# Altium PCB N76E003.PcbDoc
Units mm, origin at the board's own origin, x right, y up, seen from the top; angles counter-clockwise.
Board outline 40 x 45 mm, 4 copper layers (Top Layer, Internal Plane 1, Internal Plane 2, Bottom Layer), stack 0.462 mm thick; 13 components, 22 nets, 79 pads, 0 vias.
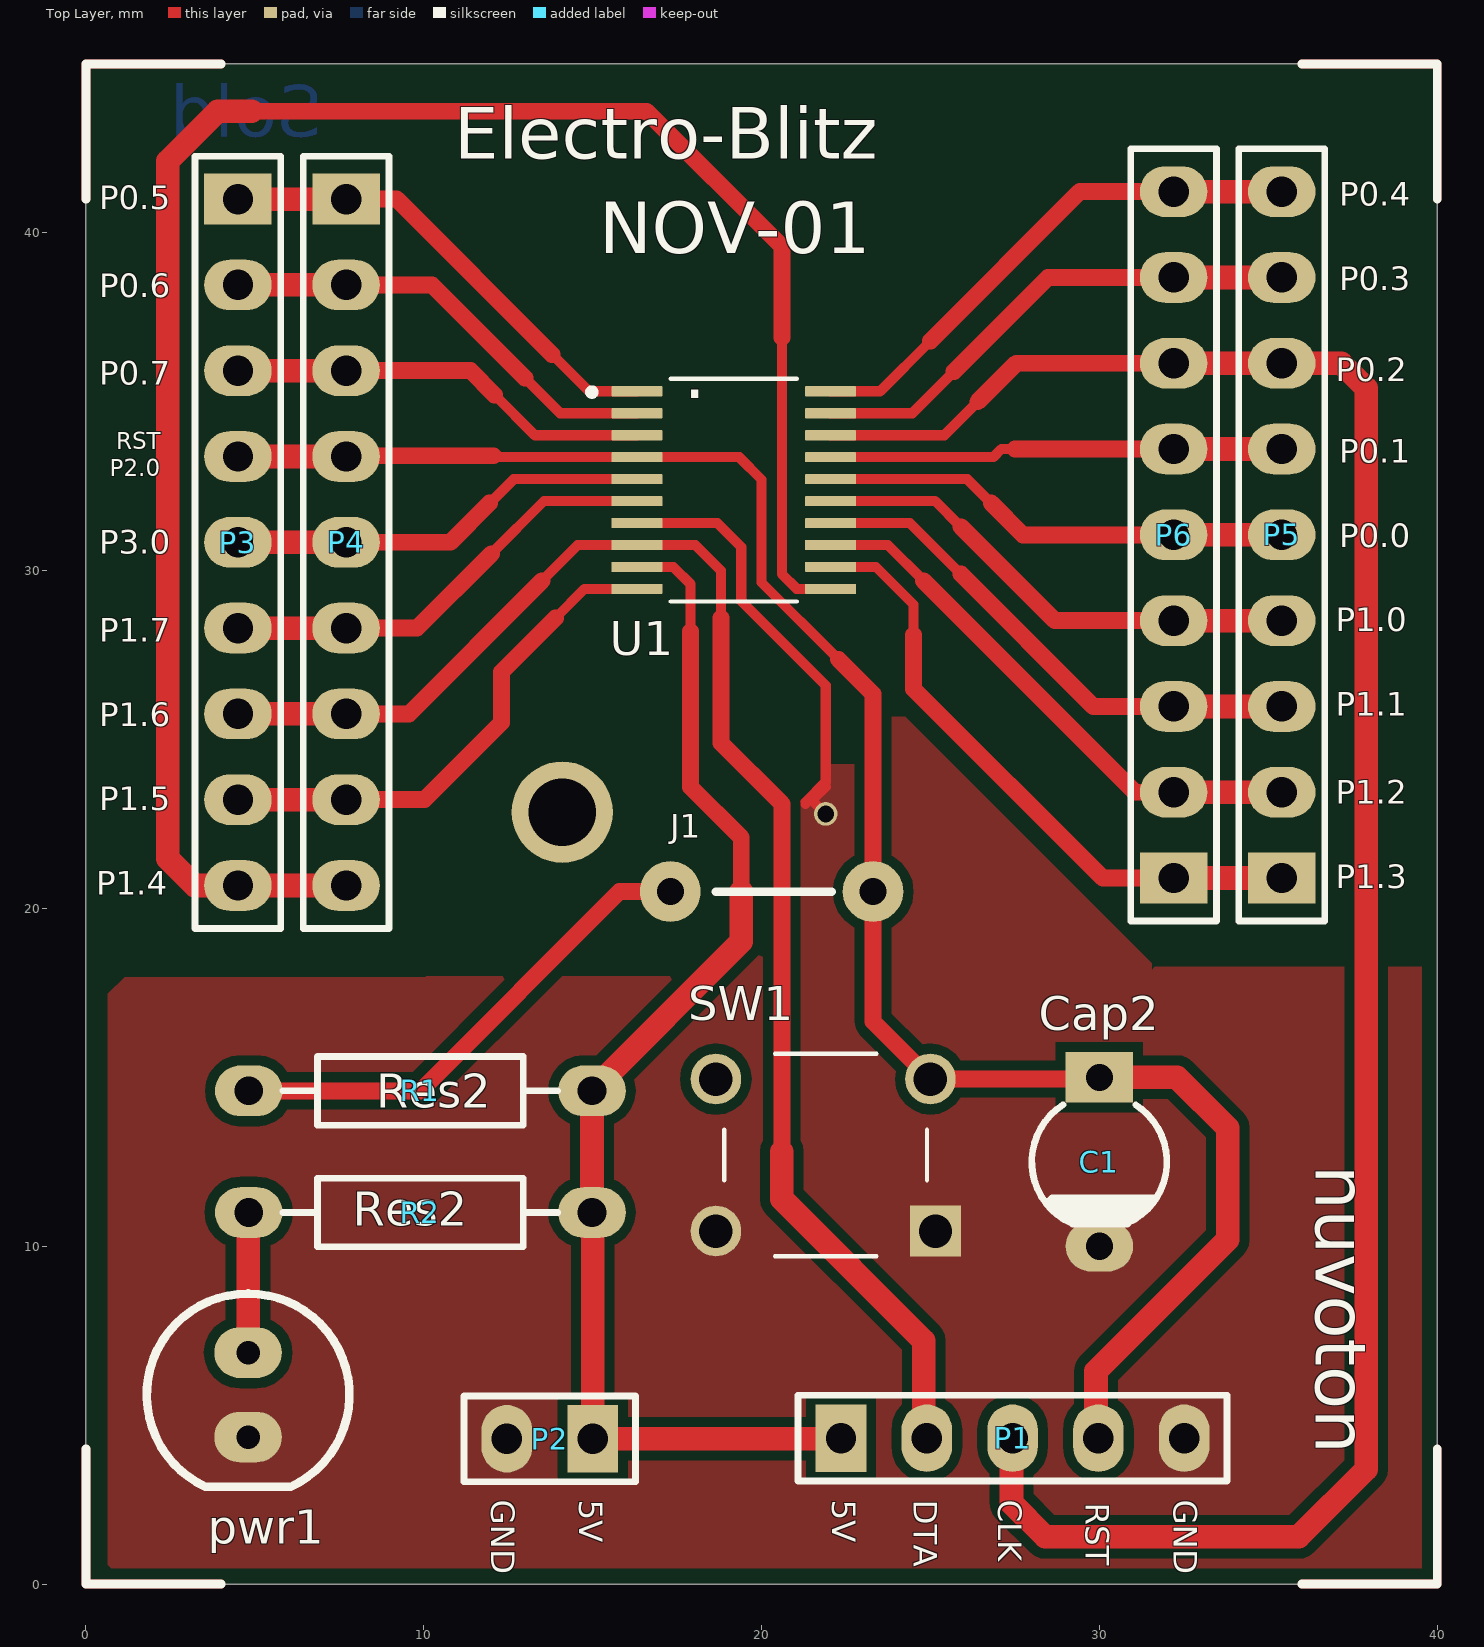
[diagram p0: Top Layer view]
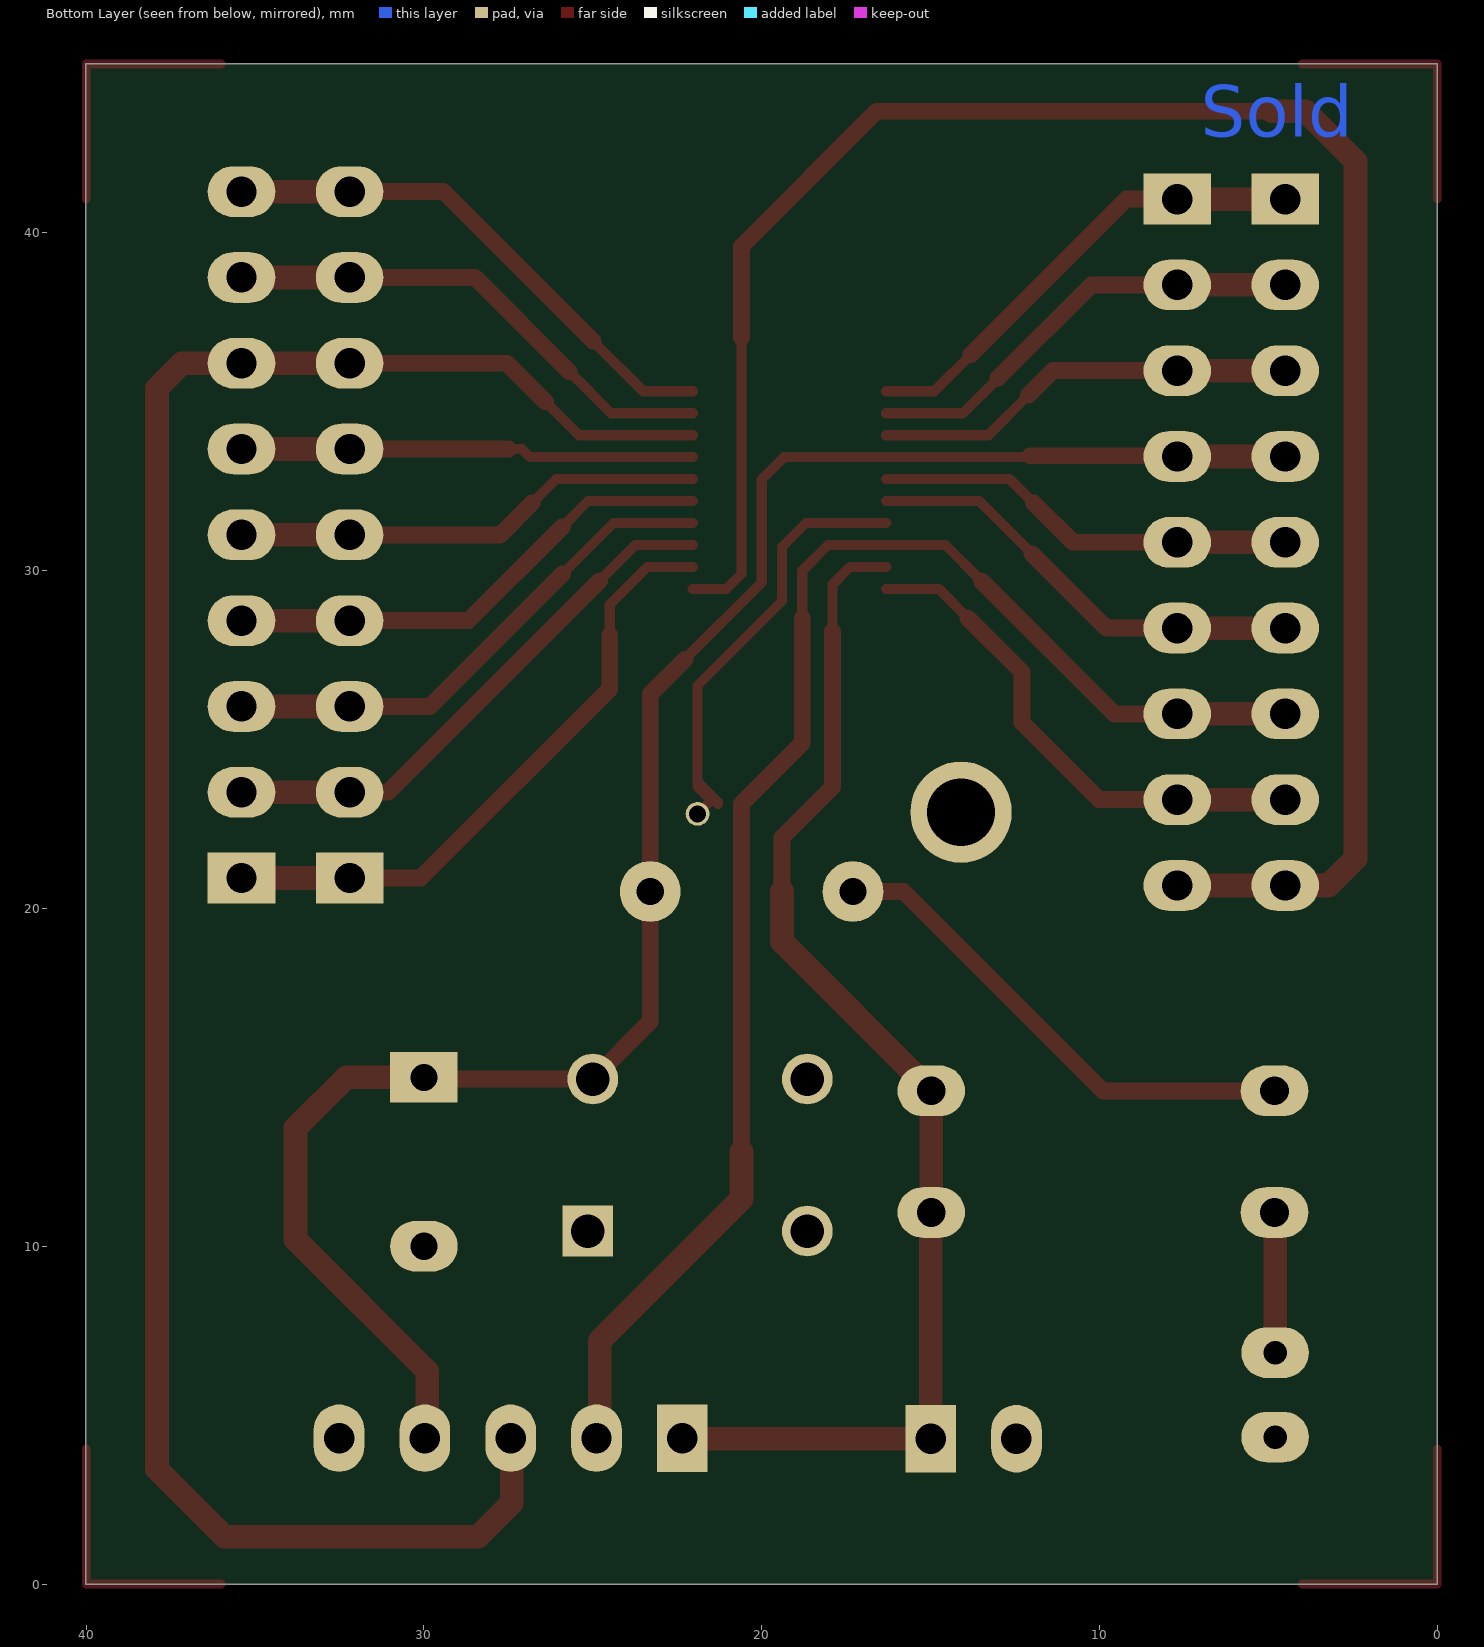
[diagram p1: Bottom Layer view, seen from below]
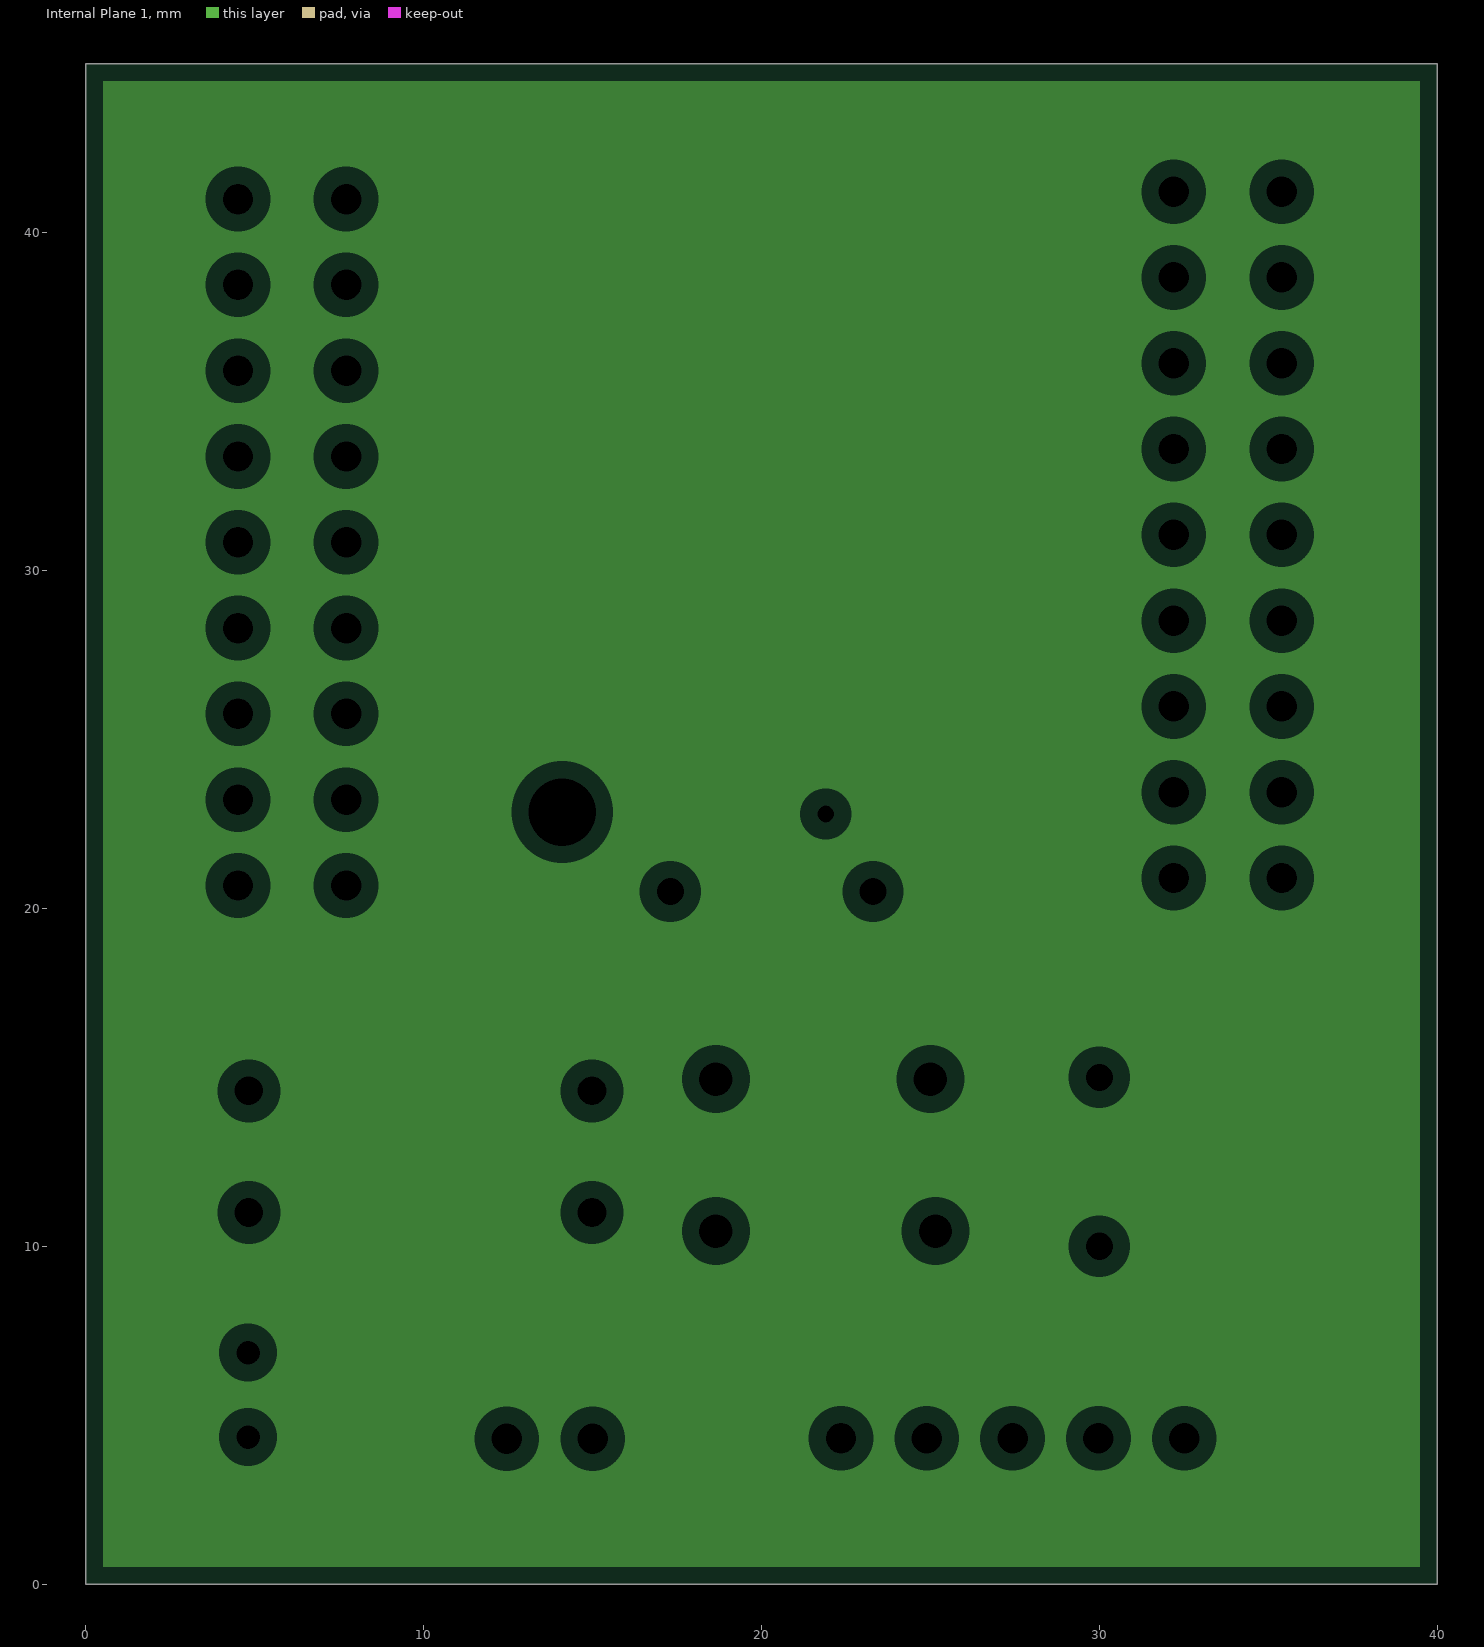
[diagram p2: Internal Plane 1, clearances drawn from the general rule]
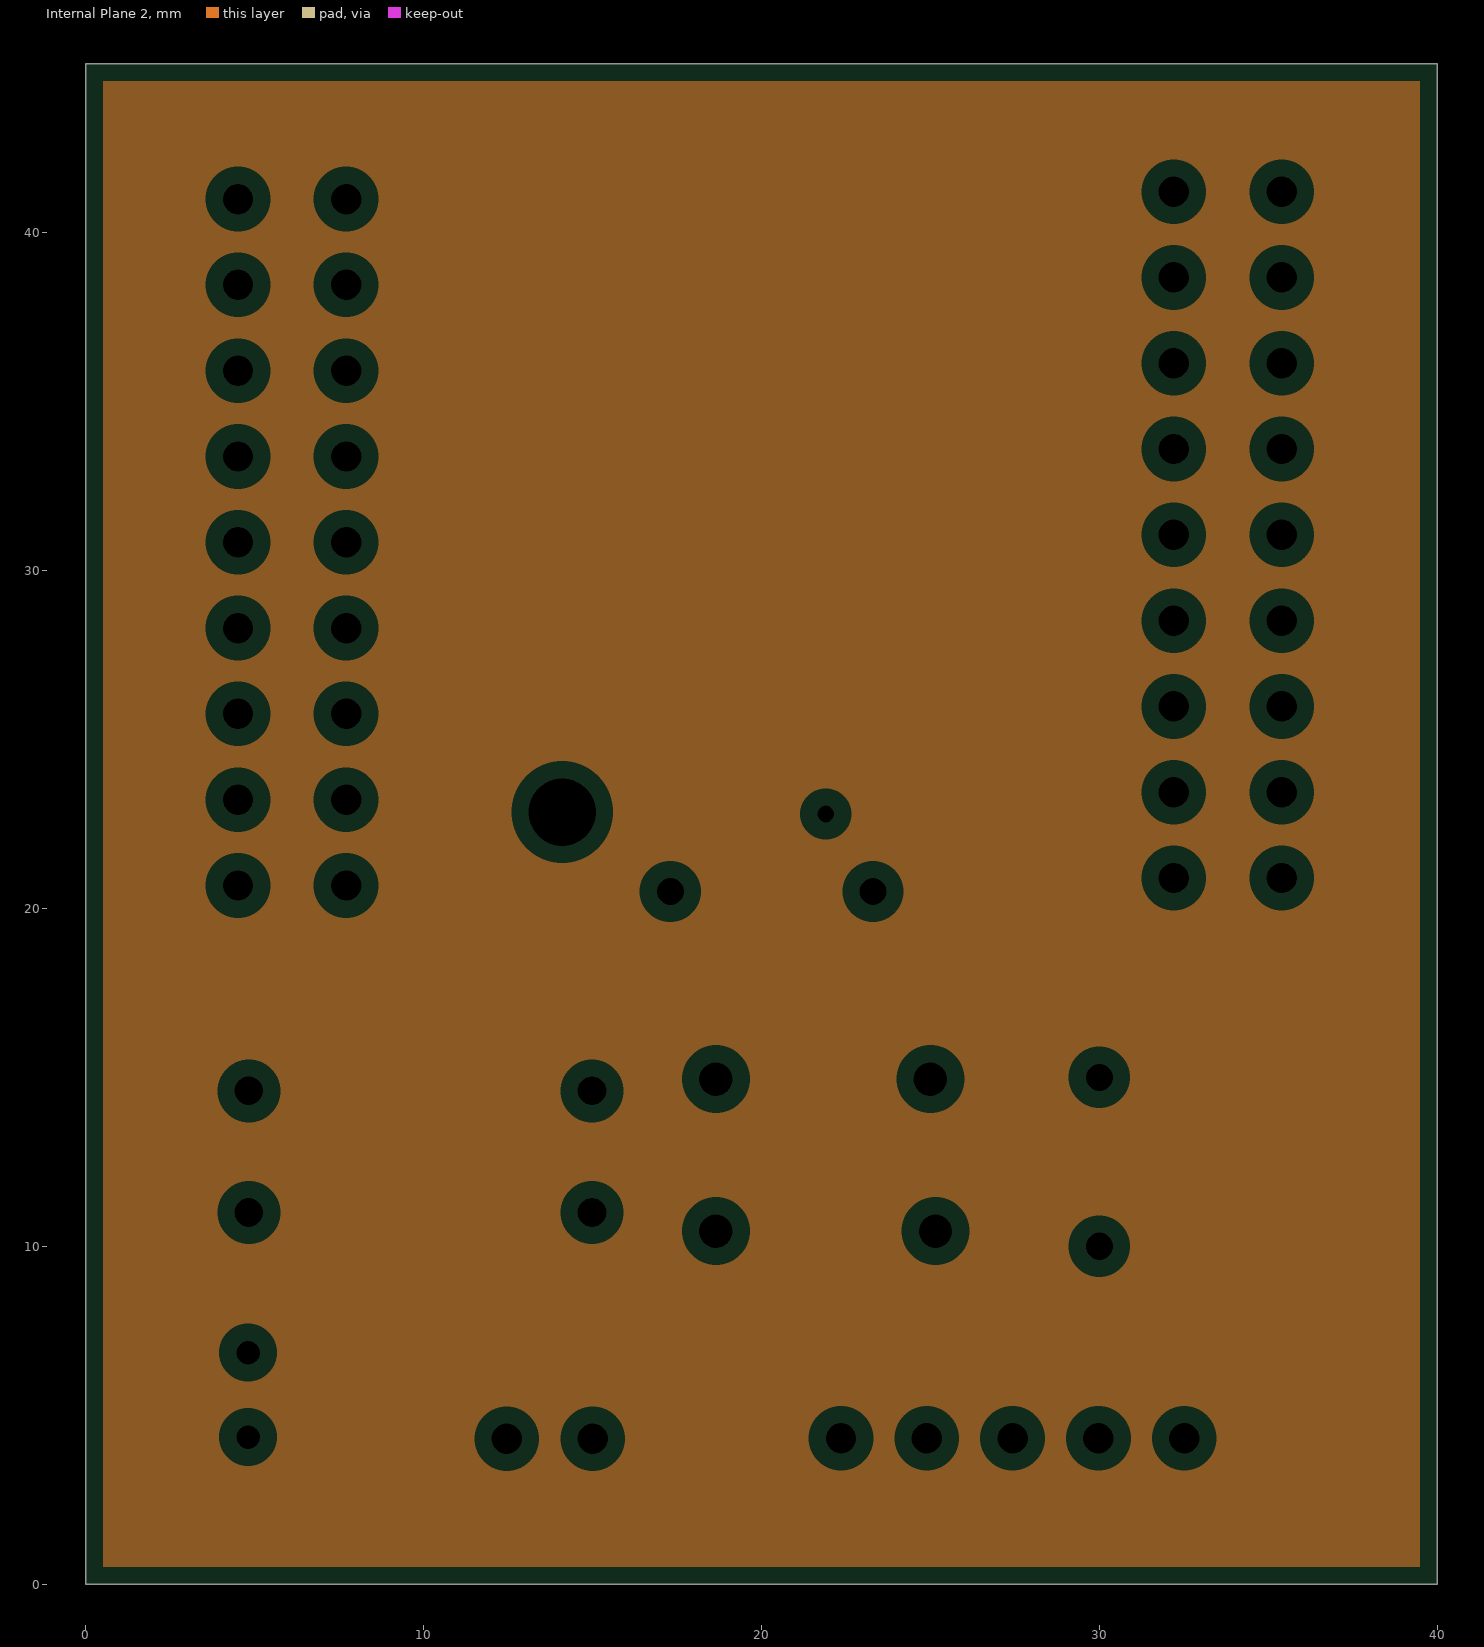
[diagram p3: Internal Plane 2, clearances drawn from the general rule]

## Layer stack, top to bottom
Top Solder: solder mask 0.0102, Solder Resist, Dk 3.5
Top Layer: signal copper 0.0356
Internal Plane 1: plane copper 0.0356
Internal Plane 2: plane copper 0.0356
Dielectric 1: dielectric 0.32, FR-4, Dk 4.8
Bottom Layer: signal copper 0.0356
Bottom Solder: solder mask 0.0102, Solder Resist, Dk 3.5

## Board outline
0,0 0,45 40.005,45 40.005,0

## Design rules (kind name [scope] priority, off if disabled: settings)
Clearance [All] p1: gap=0.3 ignorepadtopadclearanceinfootprint=FALSE
PlaneClearance [All] p1: clearance=0.508
PlaneConnect [All] p1: planeconnectstyle=Relief reliefexpansion=0.508 reliefentries=4 reliefconductorwidth=0.254 reliefairgap=0.254
PolygonConnect [All] p1: connectstyle=Direct reliefconductorwidth=0.254 reliefentries=4 polygonreliefangle="90 Angle" airgapwidth=0.254
RoutingVias [All] p1: holewidth=0.8 width=1.6 viastyle="Through Hole" minholewidth=0.711 minwidth=1.27 maxholewidth=0.711 maxwidth=1.27
SolderMaskExpansion [All] p1: expansion=0.102
Width [All] p1: maxlimit=1 minlimit=0.2 preferedwidth=0.7
28 further rules are at their usual default settings.

## Components (designator, comment, footprint, x,y, rotation, side; value= is the part's Value field where it differs from the comment)
C1 "Cap2" CAPR5-4X5 30,12.5 r270 top value=10uF
J1 "er" jumper 20.3,20.5 r180 top (schematic designator J?)
P1 "ICSP" HDR1X5 22.352,4.318 r0 top
P2 "Power" HDR1X2 15,4.3 r180 top
P3 "PIN(1-9)" HDR1X9 4.5,41 r270 top
P4 "Header 9" HDR1X9 7.7,41 r270 top
P5 "PIN(10-18)" HDR1X9 35.4,20.9 r90 top
P6 "Header 9" HDR1X9 32.2,20.9 r90 top
pwr1 "3mm" 3mm 4.8,5.6 r270 top
R1 "Res2" AXIAL-0.4 9.9,14.6 r0 top value=10K
R2 "Res2" AXIAL-0.4 9.9,11 r180 top value=220E
SW1 "3-1825910-1" TE_3-1825910-1 21.9,12.7 r180 top
U1 "N76E003AT20" SOP65P640X120-20N 19.177,32.385 r0 top

## Footprints (in the part's own frame and the unit in brackets; to place one, negate y for a bottom-side part, rotate by r counter-clockwise, add the part's x,y. Pads: shape width x height; smd on the part's side, far side on the other; paste and mask are expansions set on the pad)
3mm [mm]
  oval 1.5x2 hole 0.7: 1(-1.25,0) 2(1.25,0)
  silkscreen extent -3,-3 2.72,3, body extent -1.92,-1.92 1.52,1.92, height 5.39
AXIAL-0.4 [mm] "Axial Device, Thru-Hole; 2 Leads; 0.4 in Pin Spacing"
  oval 2x1.5 hole 0.85: 1(-5.08,0) 2(5.08,0)
  silkscreen extent -4.06,-1.02 4.06,1.02
CAPR5-4X5 [mm] "Capacitor; 2 Leads"
  rect 1.5x2 hole 0.8: 1(-2.5,0)
  oval 1.5x2 hole 0.8: 2(2.5,0)
  silkscreen extent -1.69,-2 1.82,2
HDR1X2 [mm] "Connector; Header; 2 Position"
  rect 1.5x2 hole 0.9: 1(0,0)
  oval 1.5x2 hole 0.9: 2(2.54,0)
  silkscreen extent -1.27,-1.27 3.81,1.27
HDR1X5 [mm] "Connector; Header; 5 Position"
  rect 1.5x2 hole 0.9: 1(0,0)
  oval 1.5x2 hole 0.9: 2(2.54,0) 3(5.08,0) 4(7.62,0) 5(10.16,0)
  silkscreen extent -1.27,-1.27 11.43,1.27
HDR1X9 [mm] "Connector; Header; 9 Position"
  rect 1.5x2 hole 0.9: 1(0,0)
  oval 1.5x2 hole 0.9: 2(2.54,0) 3(5.08,0) 4(7.62,0) 5(10.16,0) 6(12.7,0) 7(15.24,0) 8(17.78,0) 9(20.32,0)
  silkscreen extent -1.27,-1.27 21.59,1.27
jumper [mm]
  round 1.8 hole 0.8: 1(-3,0) 2(3,0)
  silkscreen extent -1.78,0 1.65,0
SOP65P640X120-20N [mm]
  rrect10% 1.5x0.3 smd: 1(-2.865,2.925) 2(-2.865,2.275) 3(-2.865,1.625) 4(-2.865,0.975) 5(-2.865,0.325) 6(-2.865,-0.325) 7(-2.865,-0.975) 8(-2.865,-1.625) 9(-2.865,-2.275) 10(-2.865,-2.925) 11(2.865,-2.925) 12(2.865,-2.275) 13(2.865,-1.625) 14(2.865,-0.975) 15(2.865,-0.325) 16(2.865,0.325) 17(2.865,0.975) 18(2.865,1.625) 19(2.865,2.275) 20(2.865,2.925)
  silkscreen extent -4.3,-3.3 1.87,3.3
TE_3-1825910-1 [mm]
  rect 1.498x1.498 hole 0.99: 1(-3.25,2.25)
  round 1.498 hole 0.99: 2(3.25,2.25) 3(-3.1,-2.25) 4(3.25,-2.25)
  silkscreen extent -3,-3 3,3

## Part data
C1: "Capacitor", PackageReference=CAPR5-4X5, Published=23-Sep-2002, Publisher="Altium Limited"
J1: library part jumper
P1: library part "Header 5", "Header, 5-Pin", LatestRevisionDate=17-Jul-2002, LatestRevisionNote="Re-released for DXP Platform.", Publisher="Altium Limited"
P2: library part "Header 2", "Header, 2-Pin", LatestRevisionDate=17-Jul-2002, LatestRevisionNote="Re-released for DXP Platform.", Publisher="Altium Limited"
P3 P5: library part "Header 9", "Header, 9-Pin", LatestRevisionDate=17-Jul-2002, LatestRevisionNote="Re-released for DXP Platform.", Publisher="Altium Limited"
P4 P6: "Header, 9-Pin", LatestRevisionDate=17-Jul-2002, LatestRevisionNote="Re-released for DXP Platform.", Publisher="Altium Limited"
R1 R2: "Resistor", LatestRevisionDate=17-Jul-2002, LatestRevisionNote="Re-released for DXP Platform.", PackageReference=AXIAL-0.4, Published=8-Jun-2000, Publisher="Altium Limited"
SW1: "Switch Push Button OFF _ON_ SPST Round Button 0.05A 24VDC Momentary Contact PC Pins Thru-Hole", Package=None, Availability=Unavailable, EU_RoHS_Compliance=Compliant, MF="TE Connectivity", MP=3-1825910-1, Price=None, SnapEDA_Link=https://www.snapeda.com/parts/3-1825910-1/TE%20Connectivity%20ALCOSWITCH%20Switches/view-part/452461/?ref=snap, TE_purchase_URL=https://www.te.com/usa-en/product-3-1825910-1.html?te_bu=Cor&te_type=disp&te_campaign=seda_glo_cor-seda-global-disp-prtnr-fy19-seda-model-bom-cta_sma-317_1&elqCampaignId=32493
U1: "8051 N76 Microcontroller IC 8-Bit 16MHz 18KB _18K x 8_ FLASH 20-TSSOP", Package="TSSOP-20 Nuvoton Technology", Availability=Unavailable, MF="Nuvoton Technology", MP=N76E003AT20, Price=None, SnapEDA_Link=https://www.snapeda.com/parts/N76E003AT20/Nuvoton%20Technology%20Corporation%20of%20America/view-part/652314/?ref=snap

## Free pads (board coordinates)
  round 0.7 hole 0.5: 11(21.9,22.8)
  round 3 hole 2: 12(14.1,22.85)

## Nets (pads, with @x,y where several pads share a name; then routed paths per layer and width w, separated by ;. In a path a pad name is that pad's centre, name@x,y a point inside that pad or via, vN(x,y) a via of type N, cw(c..) or ccw(c..) an arc to the next point about the centre after c; other vN are vias at no path point)
GND: C1.2 P1.5 P2.2 pad.11 pwr1.2 SW1.1 SW1.2 U1.7 | length 14.9
  Top Layer w0.3: U1.7 18.69,31.41 19.4,30.7 19.4,29.1 21.9,26.6 21.9,23.75 ; 21.3,23.1 21.3,23.15 21.9,23.75 ; pad.11 21.459,23.241 21.441,23.241 ; 21.441,23.241 21.47,23.27 ; 21.441,23.241 21.4,23.2 21.4,23.241 21.9,23.741 21.9,23.75 ; 21.47,23.27 21.8,23.6 21.9,23.6 21.57,23.27 21.47,23.27
ICPCK: P1.3 P5.7 P6.7 U1.18 | length 62.7
  Top Layer w0.3: U1.18 25.41,34.01 26.4,35
  Top Layer w0.5: 26.4,35 27.54,36.14 P6.7
  Top Layer w0.7: P1.3 27.4,4.286 27.4,2.4 28.4,1.4 35.9,1.4 37.9,3.4 37.9,35.4 37.16,36.14 P5.7 P6.7
ICPDA: P1.2 P3.7 P4.7 U1.8 | length 44.9
  Top Layer w0.3: 13.5,29.7 14.56,30.76 U1.8 18.04,30.76 18.8,30 18.8,28.6
  Top Layer w0.5: P4.7 9.56,25.76 13.5,29.7 ; 18.8,28.6 18.8,24.9 20.6,23.1 20.6,12.8
  Top Layer w0.7: P3.7 P4.7 ; 20.6,12.8 20.6,11.4 24.8,7.2 24.8,4.41 P1.2
NetJ?_2: J1.2 R1.1 | length 14.9
  Top Layer w0.5: R1.1 9.9,14.6 15.8,20.5 J1.2
Netpwr1_1: pwr1.1 R2.2 | length 4.2
  Top Layer w0.7: pwr1.1 4.8,10.98 R2.2
  Bottom Layer w0.7: R2.2@4.8,10.98 R2.2
P0.0: P5.5 P6.5 U1.16 | length 14
  Top Layer w0.3: U1.16 26.09,32.71 26.8,32
  Top Layer w0.5: 26.8,32 27.74,31.06 P6.5
  Top Layer w0.7: P6.5 P5.5
P0.1: P5.6 P6.6 U1.17 | length 13.5
  Top Layer w0.3: U1.17 26.86,33.36 27.1,33.6 27.5,33.6
  Top Layer w0.5: 27.5,33.6 P6.6
  Top Layer w0.7: P6.6 P5.6
P0.3: P5.8 P6.8 U1.19 | length 15
  Top Layer w0.3: U1.19 24.46,34.66 25.7,35.9
  Top Layer w0.5: 25.7,35.9 28.48,38.68 P6.8
  Top Layer w0.7: P6.8 P5.8
P0.4: P5.9 P6.9 U1.20 | length 15.8
  Top Layer w0.3: U1.20 23.51,35.31 25,36.8
  Top Layer w0.5: 25,36.8 29.42,41.22 P6.9
  Top Layer w0.7: P6.9 P5.9
P0.5: P3.1 P4.1 U1.1 | length 14.2
  Top Layer w0.3: 13.8,36.4 14.89,35.31 U1.1
  Top Layer w0.5: P4.1 9.2,41 13.8,36.4
  Top Layer w0.7: P3.1 P4.1
P0.6: P3.2 P4.2 U1.2 | length 13.4
  Top Layer w0.3: 13,35.7 14.04,34.66 U1.2
  Top Layer w0.5: P4.2 10.24,38.46 13,35.7
  Top Layer w0.7: P3.2 P4.2
P0.7: P3.3 P4.3 U1.3 | length 12.6
  Top Layer w0.3: 12.1,35.2 13.29,34.01 U1.3
  Top Layer w0.5: P4.3 11.38,35.92 12.1,35.2
  Top Layer w0.7: P3.3 P4.3
P1.0: P5.4 P6.4 U1.15 | length 14.8
  Top Layer w0.3: U1.15 25.14,32.06 25.9,31.3
  Top Layer w0.5: 25.9,31.3 28.68,28.52 P6.4
  Top Layer w0.7: P6.4 P5.4
P1.1: P5.3 P6.3 U1.14 | length 15.6
  Top Layer w0.3: U1.14 24.39,31.41 25.9,29.9
  Top Layer w0.5: 25.9,29.9 29.82,25.98 P6.3
  Top Layer w0.7: P6.3 P5.3
P1.2: P5.2 P6.2 U1.13 | length 16.4
  Top Layer w0.3: U1.13 23.74,30.76 24.8,29.7
  Top Layer w0.5: 24.8,29.7 31.06,23.44 P6.2
  Top Layer w0.7: P6.2 P5.2
P1.3: P5.1 P6.1 U1.12 | length 18.6
  Top Layer w0.3: U1.12 23.39,30.11 24.5,29 24.5,28.1
  Top Layer w0.5: 24.5,28.1 24.5,26.5 30.1,20.9 P6.1
  Top Layer w0.7: P6.1 P5.1
P1.4: P3.9 P4.9 U1.11 | length 58
  Top Layer w0.3: 20.6,36.9 20.6,29.9 21.04,29.46 U1.11
  Top Layer w0.5: 4.9,43.6 16.6,43.6 20.6,39.6 20.6,36.9
  Top Layer w0.7: 4.9,43.6 3.9,43.6 2.42,42.12 2.42,21.48 3.22,20.68 P3.9 P4.9
P1.5: P3.8 P4.8 U1.10 | length 15.3
  Top Layer w0.3: 13.9,28.6 14.76,29.46 U1.10
  Top Layer w0.5: P4.8 10.02,23.22 12.3,25.5 12.3,27 13.9,28.6
  Top Layer w0.7: P3.8 P4.8
P1.7: P3.6 P4.6 U1.6 | length 13.4
  Top Layer w0.3: 12,30.5 13.56,32.06 U1.6
  Top Layer w0.5: P4.6 9.8,28.3 12,30.5
  Top Layer w0.7: P3.6 P4.6
P3.0: P3.5 P4.5 U1.5 | length 12.6
  Top Layer w0.3: 11.95,32 12.66,32.71 U1.5
  Top Layer w0.5: P4.5 10.79,30.84 11.95,32
  Top Layer w0.7: P3.5 P4.5
RESET: C1.1 J1.1 P1.4 P3.4 P4.4 SW1.3 U1.4 | length 55.8
  Top Layer w0.3: 12.1,33.36 U1.4 19.34,33.36 20,32.7 20,29.651 22.276,27.376
  Top Layer w0.5: P4.4 7.72,33.4 12.06,33.4 ; 22.276,27.376 23.3,26.351 J1.1 23.3,16.65 SW1.3 29.95,14.95 C1.1
  Top Layer w0.7: P3.4 P4.4 ; P1.4 29.9,4.39 29.9,6.3 33.8,10.2 33.8,13.5 32.3,15 C1.1
VCC: P1.1 P2.1 R1.2 R2.1 U1.9 | length 37
  Top Layer w0.3: U1.9 17.39,30.11 17.9,29.6 17.9,28.2
  Top Layer w0.5: 17.9,28.2 17.9,23.6 19.4,22.1 19.4,20.5
  Top Layer w0.7: 19.4,20.5 19.4,19.02 R1.2 R2.1 15,10.98 P2.1 22.334,4.3 P1.1
  Bottom Layer w0.7: R2.1 R2.1@15,10.98 ; P1.1@22.334,4.3 P1.1
pads on no net: SW1.4
copper on no net: | length 32
  Top Layer w0.254: 0,4 0,0 4,0 ; 0,41 0,45 4,45 ; 36,0 40,0 40,4 ; 36,45 40,45 40,41

## Polygon pours and split planes (outlines as drawn)
GND on Top Layer "GND_L01_P000" (solid, remove dead copper, pour order 0): 0.647,17.47 1.147,17.97 10.047,17.97 15.147,23.07 15.147,25.57 15.247,25.67 24.247,25.67 31.547,18.37 31.547,18.17 31.647,18.27 39.547,18.27 39.547,0.47 0.747,0.47 0.647,0.57

## Keep-outs
Keep-Out Layer:
  lines w0.3: -55.723,-14.575 68.677,-14.575 68.677,84.425 -55.723,84.425 -55.723,-14.575

## Other copper
Top Layer:
  pour cut-out: 19.361,25.67 19.361,25.132 20.117,24.376 21.076,24.376 21.175,24.276 22.739,24.276 22.739,25.67
  pour cut-out: 15.147,25.57 15.147,23.07 10.077,18 17.5,18 18.742,19.242 18.742,19.29 18.839,19.386 18.839,21.868 17.382,23.325 17.382,23.385 17.339,23.428 17.339,25.67 15.247,25.67
Bottom Layer:
  text "Sold" at 7,42.85 h1.52

## Silkscreen, mask and mechanical layers (free items; w line width, h text height)
Top Overlay:
  lines w0.254: 0,4 0,0 4,0 ; 0,41 0,45 4,45 ; 30.832,10.681 29.219,10.681 29,10.9 31.1,10.9 31.2,11 28.8,11 28.6,11.2 ; 36,0 40,0 40,4 ; 36,45 40,45 40,41 ; 28.5,11.3 28.6,11.4 31.6,11.4 31.5,11.3 28.5,11.3 ; 28.5,11.3 28.6,11.2 ; 28.6,11.2 31.3,11.2 28.6,11.2
  text "Electro-Blitz" at 10.9,42.2 h1.52
  text "P0.4" at 37.1,40.8 h0.7
  text "P0.5" at 0.4,40.7 h0.7
  text "NOV-01" at 15.2,39.4 h1.52
  text "P0.3" at 37.1,38.3 h0.7
  text "P0.6" at 0.4,38.1 h0.7
  text "P0.2" at 37,35.6 h0.7
  text "P0.7" at 0.4,35.5 h0.7
  text "." at 17.7,35.1 h1.52
  text "RST" at 0.9,33.6 h0.5
  text "P0.1" at 37.1,33.2 h0.7
  text "P2.0" at 0.7,32.8 h0.5
  text "P0.0" at 37.1,30.7 h0.7
  text "P3.0" at 0.4,30.5 h0.7
  text "P1.0" at 37,28.2 h0.7
  text "P1.7" at 0.4,27.9 h0.7
  text "P1.1" at 37,25.7 h0.7
  text "P1.6" at 0.4,25.4 h0.7
  text "P1.2" at 37,23.1 h0.7
  text "P1.5" at 0.4,22.9 h0.7
  text "P1.3" at 37,20.6 h0.7
  text "P1.4" at 0.3,20.4 h0.7
  text "nuvoton" at 36.4,12.4 h1.52 r270
  text "GND" at 12,2.5 h0.7 r270
  text "5V" at 14.6,2.5 h0.7 r270
  text "5V" at 22.1,2.5 h0.7 r270
  text "DTA" at 24.5,2.5 h0.7 r270
  text "CLK" at 27,2.5 h0.7 r270
  text "GND" at 32.2,2.5 h0.7 r270
  text "RST" at 29.6,2.4 h0.7 r270
Top Solder:
  lines w0.254: 0,4 0,0 4,0 ; 0,41 0,45 4,45 ; 36,0 40,0 40,4 ; 36,45 40,45 40,41
Bottom Solder:
  lines w0.254: 0,4 0,0 4,0 ; 0,41 0,45 4,45 ; 36,0 40,0 40,4 ; 36,45 40,45 40,41
Mechanical 1:
  the board outline again, w0.254
Drill Drawing:
  text ".LEGEND" at 75.057,-10.795 h1.52
  text "Drill Drawing." at 75.057,-13.335 h1.52

## Dimensions
0,0 to 40,0 on Mechanical 1
0,0 to 0,45 on Mechanical 1